# Altium PCB MyECGPCB_V1.2.9.PcbDoc (part 1 of 2)
Units mil, origin at the board's own origin, x right, y up, seen from the top; angles counter-clockwise.
Board outline 3250 x 3250 mil, 2 copper layers (Top Layer, Bottom Layer); 151 components, 107 nets, 475 pads, 167 vias.
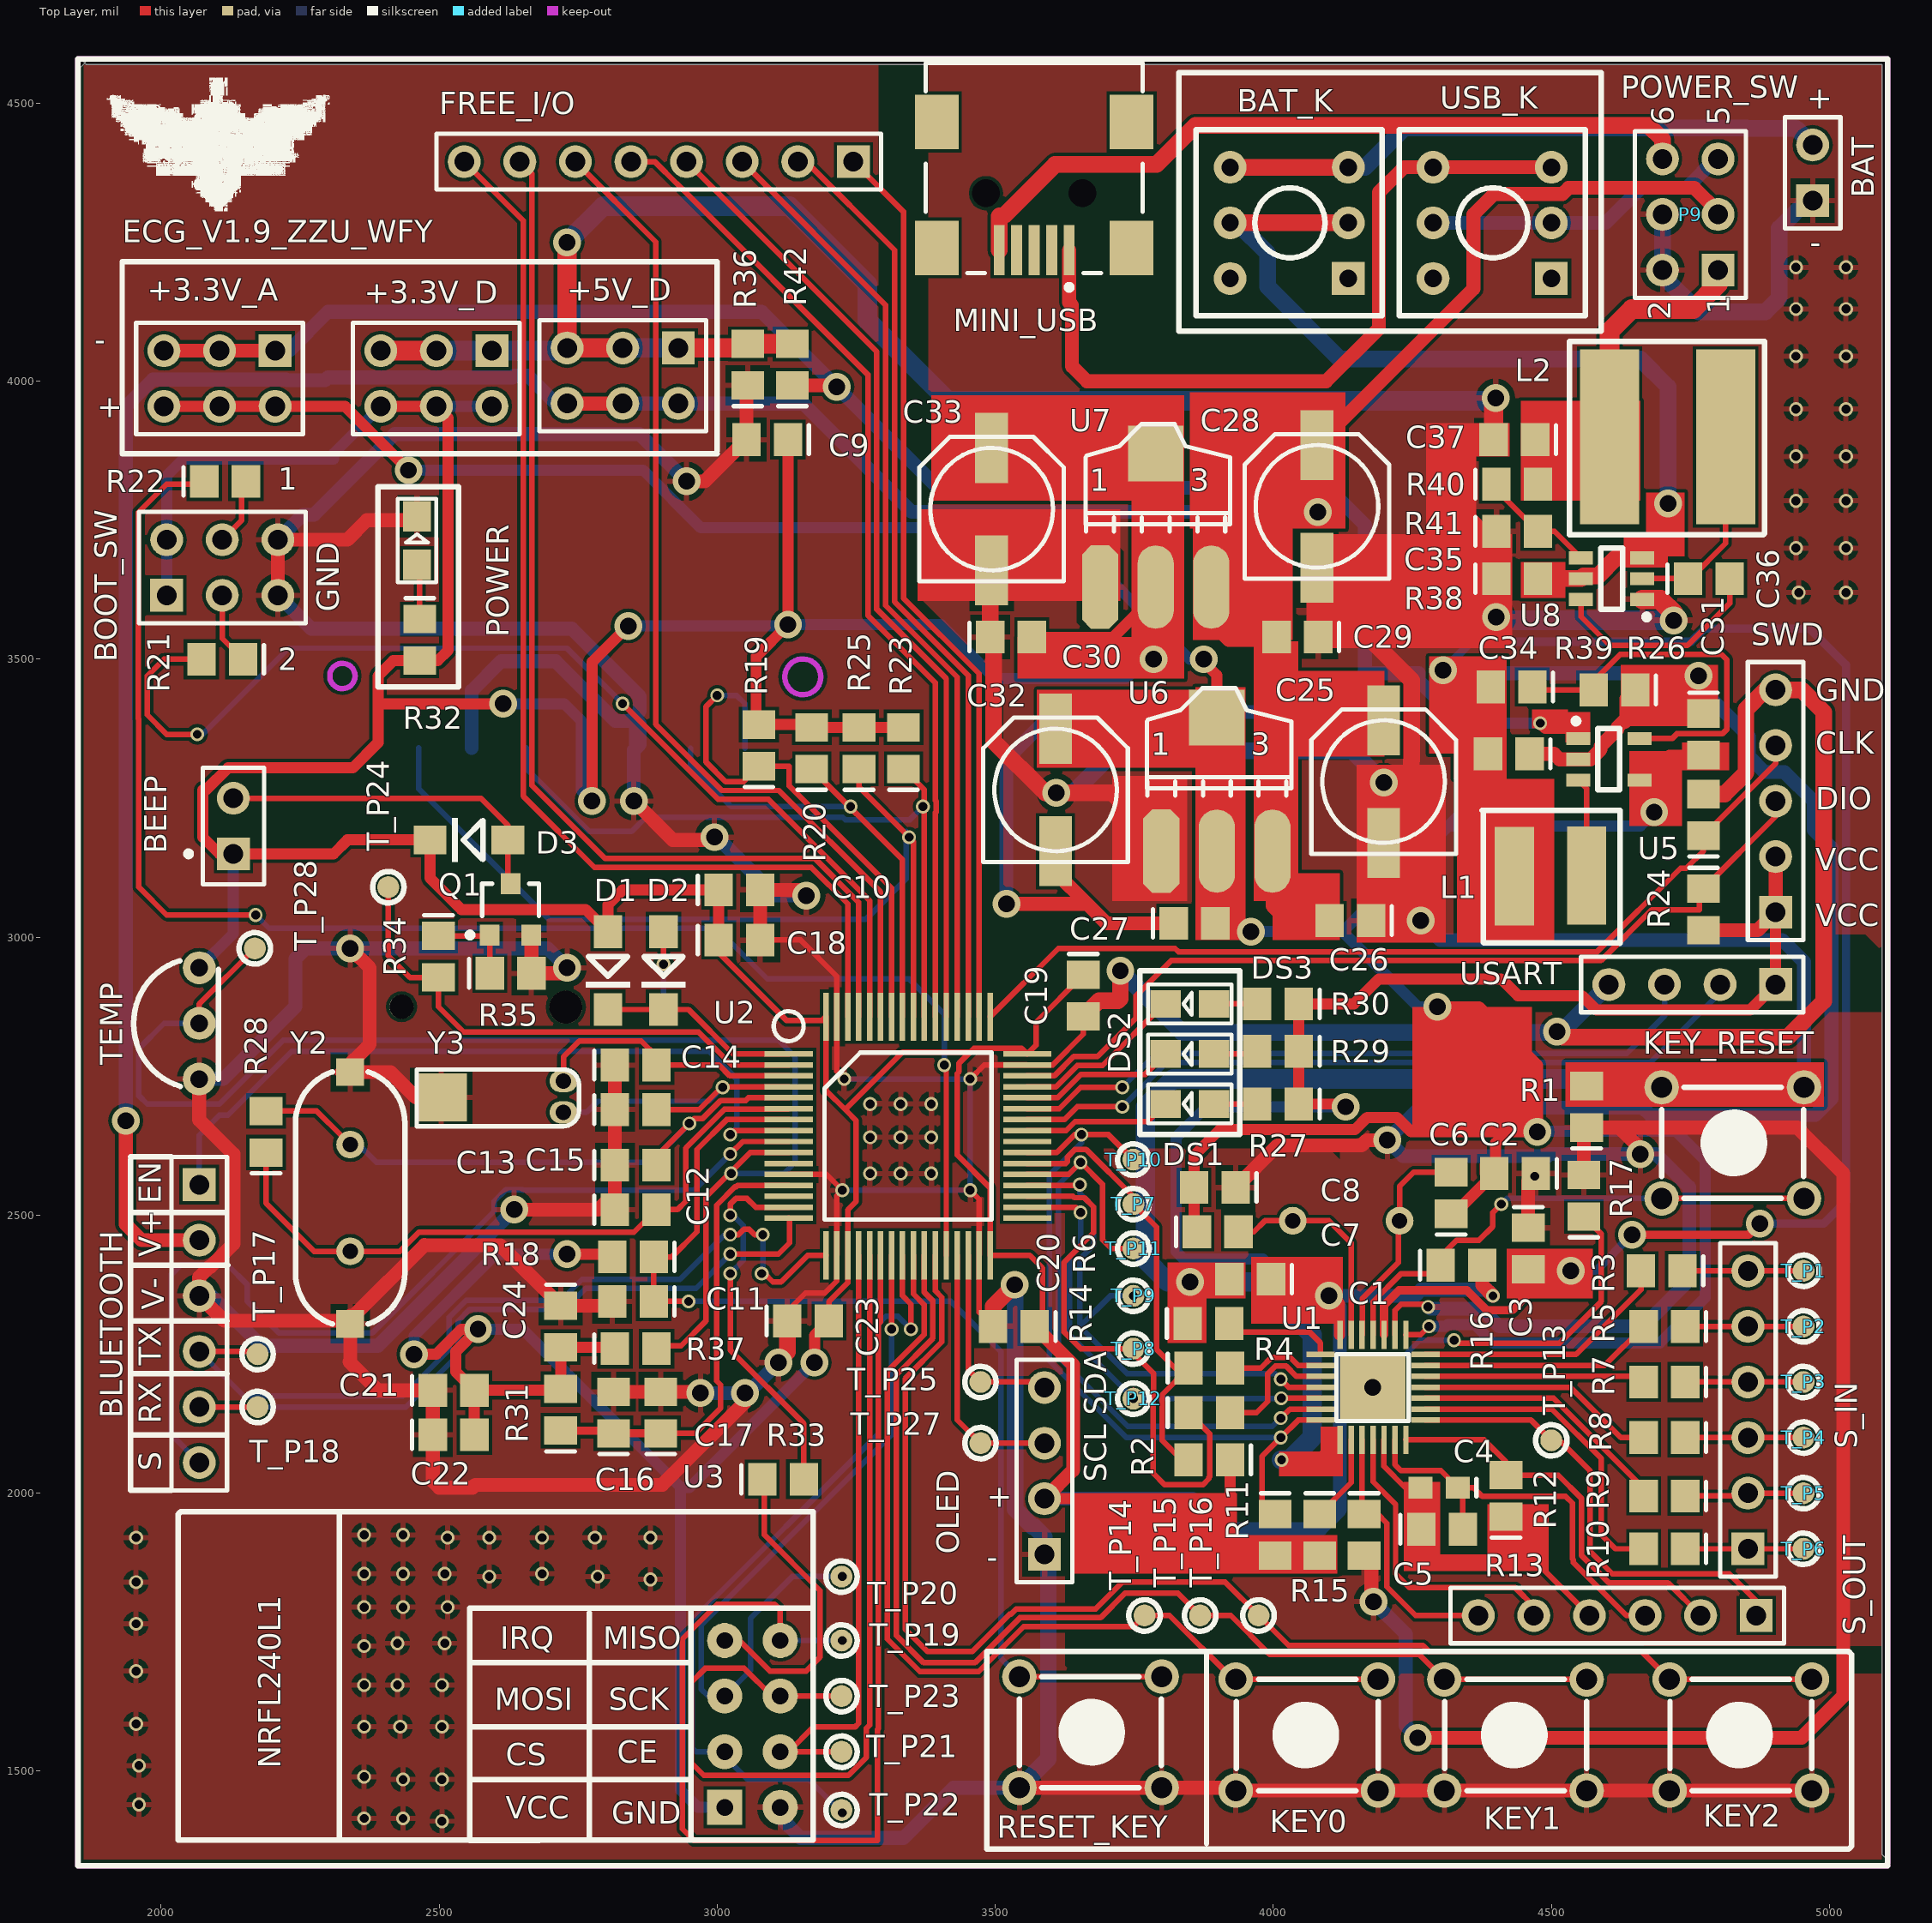
[diagram p0: Top Layer view]
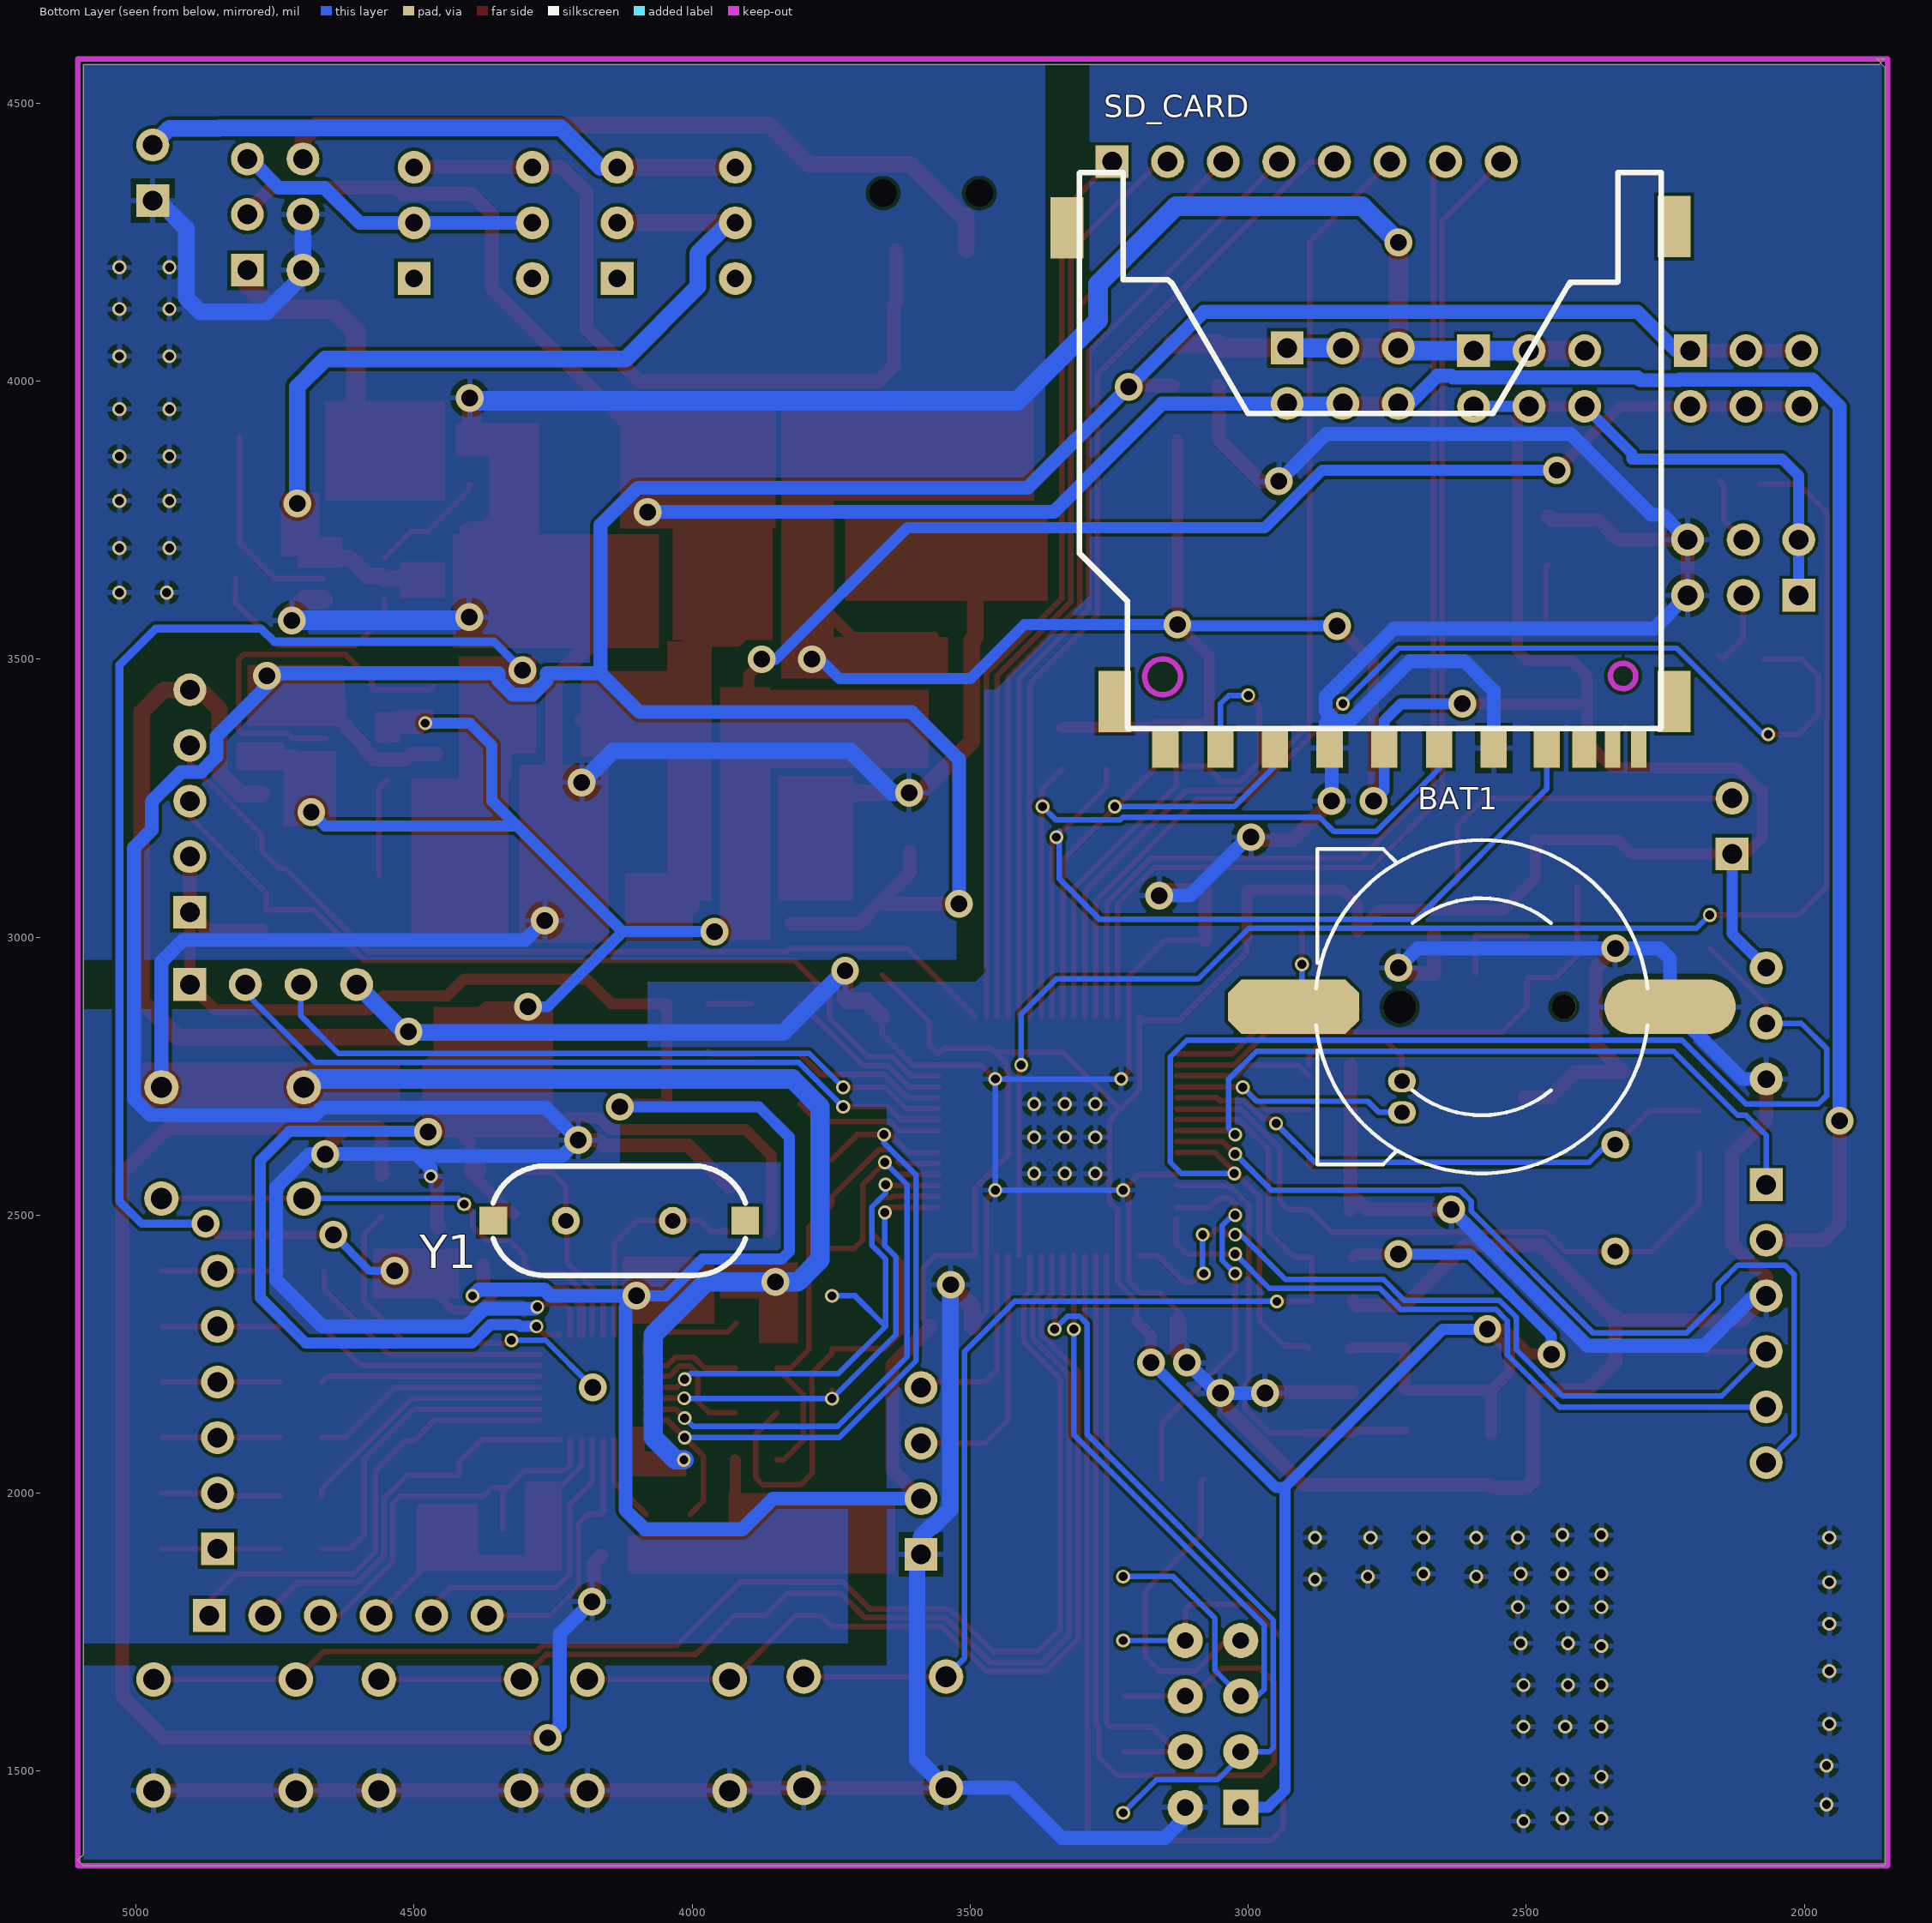
[diagram p1: Bottom Layer view, seen from below]

## Layer stack, top to bottom
Top Solder: solder mask 0.4, Solder Resist, Dk 3.5
Top Layer: signal copper 1.4
Dielectric 1: dielectric 12.6, FR-4, Dk 4.8
Bottom Layer: signal copper 1.4
Bottom Solder: solder mask 0.4, Solder Resist, Dk 3.5

## Board outline
1855,4580 1865,4570 5095,4570 5095,1350 5105,1340 5095,1330 1855,1330 1855,4565 1870,4580

## Design rules (kind name [scope] priority, off if disabled: settings)
Clearance [All] p1: gap=6
PolygonConnect [All] p1: connectstyle=Relief reliefconductorwidth=10 reliefentries=4 polygonreliefangle="90 Angle" airgapwidth=10
RoutingVias [All] p1: holewidth=28 width=50 viastyle="Through Hole" minholewidth=16 minwidth=25 maxholewidth=28 maxwidth=50
SolderMaskExpansion [All] p1: expansion=4
Width [All] p1: maxlimit=40 minlimit=10 preferedwidth=10 minimp=50.000000 maximp=50.000000 favimp=50.000000
30 further rules are at their usual default settings.

## Classes and differential pairs
component class U_PowerSheet: +3.3V_A +3.3V_D +5V_D BAT BAT_K C25 C26 C27 C28 C29 C30 C31 C32 C33 C34 C35 C36 C37 L1 L2 MINI_USB P9 R38 R39 R40 R41 R42 U5 U6 U7 U8 USB_K
component class U_MCUSheet: BAT1 BEEP BLUETOOTH BOOT_SW C9 C10 C11 C12 C13 C14 C15 C16 C17 C18 C19 C20 C21 C22 C23 C24 D1 D2 D3 DS1 DS2 DS3 FREE_I/O KEY0 KEY1 KEY2 OLED POWER Q1 R18 R19 R20 R21 R22 R23 R24 R25 R26 R27 R28 R29 R30 R31 R32 R33 R34 R35 R36 R37 RESET_KEY SD_CARD SWD T_P14 T_P15 T_P16 T_P17 T_P18 T_P19 T_P20 T_P21 T_P22 T_P23 T_P24 T_P25 T_P27 T_P28 TEMP U2 U3 USART Y2 Y3
component class U_FrontEndSheet: C1 C2 C3 C4 C5 C6 C7 C8 KEY_RESET R1 R2 R3 R4 R5 R6 R7 R8 R9 R10 R11 R12 R13 R14 R15 R16 R17 S_IN S_OUT T_P1 T_P2 T_P3 T_P4 T_P5 T_P6 T_P7 T_P8 T_P9 T_P10 T_P11 T_P12 T_P13 U1

## Components (designator, comment, footprint, x,y, rotation, side; value= is the part's Value field where it differs from the comment)
+3.3V_A "+3.3V_A" HDR2X3 2205,4055 r180 top (schematic designator VOUT4)
+3.3V_D "+3.3V_D" HDR2X3 2595,4055 r180 top (schematic designator VOUT3)
+5V_D "+5V_D" HDR2X3 2930,4060 r180 top (schematic designator VOUT2)
BAT "Header 2" HDR1X2 4970,4325 r90 top (schematic designator P8)
BAT1 "BATT" BATM 2580,2875 r270 bottom
BAT_K "BUTTON" BTN8.5*8.5 4135,4185 r180 top (schematic designator K2)
BEEP "Speaker" PIN2 2130,3150 r90 top (schematic designator LS1)
BLUETOOTH "Header 6" HDR1X6 2068.5,2555 r270 top (schematic designator P4)
BOOT_SW "VCC5" HDR2X3 2010,3615 r0 top (schematic designator VOUT1)
C1 "0.1uF" 0805 3958.5,2385 r180 top
C2 "0.1uF" 0805 4435,2575 r180 top
C3 "0.1uF" 0805 4458.5,2440 r270 top
C4 "1nF" 0603 4298.5,2010 r180 top
C5 "0.1uF" 0805 4163.5,1925 r270 top
C6 "22pF" 0805 4320,2540 r90 top
C7 "22pF" 0805 3900,2470 r0 top
C8 "0.1uF" 0805 3895,2550 r180 top
C9 "0.1uf" 0805 3090,3895 r180 top
C10 "0.1uF" 0805 3040,3085 r0 top
C11 "0.1uf" 0805 2848.5,2345 r180 top
C12 "22" 0805 2853.5,2510 r0 top
C13 "22" 0805 2853.5,2690 r0 top
C14 "22" 0805 2853.5,2770 r0 top
C15 "22" 0805 2853.5,2590 r0 top
C16 "10u" 0805 2898.5,2145 r90 top
C17 "0.1uf" 0805 2813.5,2145 r90 top
C18 "0.1uF" 0805 3040,2995 r0 top
C19 "104" 0805 3658.5,2895 r270 top
C20 "104" 0805 3533.5,2300 r180 top
C21 "10uF" 0805 2525.9,2185 r0 top
C22 "104" 0805 2525.9,2105 r0 top
C23 "104" 0805 3163.5,2310 r0 top
C24 "104" 0805 2718.5,2300 r270 top
C25 "220uF" CC6.56.5 4198.5,3280 r270 top
C26 "104" 0805 4138.5,3030 r180 top
C27 "104" 0805 3858.5,3025 r0 top
C28 "220uF" CC6.56.5 4078.5,3775 r270 top
C29 "104" 0805 4043.5,3540 r180 top
C30 "104" 0805 3528.5,3540 r0 top
C31 "4.7uf" 0805 4773.5,3365 r270 top
C32 "220uF" CC6.56.5 3608.5,3265 r270 top
C33 "220uF" CC6.56.5 3493.5,3770 r270 top
C34 "10uf" 0805 4423.5,3330 r180 top
C35 "10uf" 0805 4438.5,3645 r0 top
C36 "100nf" 0805 4783.5,3645 r0 top
C37 "22uf" 0805 4433.5,3895 r180 top
D1 "1N4148" DIODE_SOP 2803.5,3010 r270 top
D2 "1N4148" DIODE_SOP 2903.5,3010 r270 top
D3 "1N4148" DIODE_SOP 2623.5,3175 r180 top
DS1 "LED1" SMDLED 3893.5,2700 r180 top
DS2 "LED1" SMDLED 3893.5,2790 r180 top
DS3 "LED1" SMDLED 3893.5,2880 r180 top
FREE_I/O "Header 8" HDR1X8 3245,4395 r180 top (schematic designator P7)
KEY0 "KEY_M" KEY_M 4188.5,1465 r180 top
KEY1 "KEY_M" KEY_M 4563.5,1465 r180 top
KEY2 "KEY_M" KEY_M 4968.5,1465 r180 top
KEY_RESET "KEY_M" KEY_M 4698.5,2730 r0 top (schematic designator KEY?)
L1 "Inductor" SDR0403 4563.5,3110 r270 top
L2 "Inductor" SDR0805 4813.5,3900 r270 top
MINI_USB "USB" USB/SM0.8-6H5 3570,4545 r90 top (schematic designator USB_?)
OLED "Header 4" HDR1X4 3588.5,1890 r90 top (schematic designator P6)
P9 "Header 3X2" HDR2X3 4800,4200 r90 top
POWER "PWR" SMDLED 2460,3670 r90 top (schematic designator DS0)
Q1 "S8050" SOT-23R 2628.5,3045 r0 top
R1 "0" 0805 4563.5,2695 r90 top
R2 "1M" 0805 3885,2060 r180 top
R3 "0" 0805 4698.5,2400 r180 top
R4 "51" 0805 3885,2225 r0 top
R5 "0" 0805 4703.5,2300 r180 top
R6 "51" 0805 3885,2145 r0 top
R7 "0" 0805 4703.5,2200 r180 top
R8 "0" 0805 4703.5,2100 r180 top
R9 "0" 0805 4703.5,1995 r180 top
R10 "0" 0805 4703.5,1900 r180 top
R11 "1M" 0805 4003.5,1925 r270 top
R12 "10K" 0805 4418.5,1995 r90 top
R13 "10M" 0805 4303.5,1935 r0 top
R14 "1M" 0805 3883.5,2305 r0 top
R15 "1M" 0805 4083.5,1925 r270 top
R16 "1M" 0805 4338.5,2410 r0 top
R17 "0" 0805 4558.5,2535 r90 top
R18 "10K" 0805 2848.5,2425 r180 top
R19 "45K" 0805 3075,3345 r90 top
R20 "45K" 0805 3170,3340 r90 top
R21 "10K" 0805 2110,3500 r180 top
R22 "10K" 0805 2115,3820 r0 top
R23 "45K" 0805 3335,3340 r90 top
R24 "10K" 0805 4773.5,3050 r270 top
R25 "45K" 0805 3255,3340 r90 top
R26 "10K" 0805 4773.5,3220 r90 top
R27 "510" 0805 4008.5,2700 r180 top
R28 "1M" 0805 2188.5,2650 r90 top
R29 "510" 0805 4008.5,2795 r180 top
R30 "510" 0805 4008.5,2880 r180 top
R31 "10" 0805 2718.5,2150 r90 top
R32 "510" 0805 2465,3535 r270 top
R33 "4.7k" 0805 3118.5,2025 r0 top
R34 "1k" 0805 2498.5,2965 r270 top
R35 "10k" 0805 2628.5,2935 r0 top
R36 "0" 0805 3055,4030 r90 top
R37 "4.7K" 0805 2853.5,2260 r0 top
R38 "301K" 0805 4428.5,3450 r180 top
R39 "100K" 0805 4613.5,3445 r180 top
R40 "56.2K" 0805 4438.5,3815 r0 top
R41 "10K" 0805 4438.5,3730 r0 top
R42 "0" 0805 3135,4030 r90 top
RESET_KEY "KEY_M" KEY_M 3543.5,1670 r0 top
S_IN "输入" HDR1X6 4853.5,1900 r90 top (schematic designator P1)
S_OUT "Header 6" HDR1X6 4868.5,1780 r180 top (schematic designator P2)
SD_CARD "sd card" SDCARD_L 3050,3340 r0 bottom (schematic designator SD_CARD?)
SWD "Header 5" HDR1X5 4903.5,3045 r90 top (schematic designator P3)
T_P1 "Test_Pad" PCB_Test_Pad 4953.5,2400 r90 top
T_P2 "Test_Pad" PCB_Test_Pad 4953.5,2300 r90 top
T_P3 "Test_Pad" PCB_Test_Pad 4953.5,2200 r90 top
T_P4 "Test_Pad" PCB_Test_Pad 4953.5,2100 r90 top
T_P5 "Test_Pad" PCB_Test_Pad 4953.5,2000 r90 top
T_P6 "Test_Pad" PCB_Test_Pad 4953.5,1900 r90 top
T_P7 "Test_Pad" PCB_Test_Pad 3748.5,2520 r90 top
T_P8 "Test_Pad" PCB_Test_Pad 3748.5,2260 r90 top
T_P9 "Test_Pad" PCB_Test_Pad 3748.5,2355 r90 top
T_P10 "Test_Pad" PCB_Test_Pad 3748.5,2600 r90 top
T_P11 "Test_Pad" PCB_Test_Pad 3748.5,2440 r90 top
T_P12 "Test_Pad" PCB_Test_Pad 3748.5,2170 r90 top
T_P13 "Test_Pad" PCB_Test_Pad 4500,2095 r90 top
T_P14 "Test_Pad" PCB_Test_Pad 3768.5,1780 r90 top
T_P15 "Test_Pad" PCB_Test_Pad 3868.5,1780 r90 top
T_P16 "Test_Pad" PCB_Test_Pad 3973.5,1780 r90 top
T_P17 "Test_Pad" PCB_Test_Pad 2173.5,2250 r270 top
T_P18 "Test_Pad" PCB_Test_Pad 2173.5,2155 r270 top
T_P19 "Test_Pad" PCB_Test_Pad 3223.5,1735 r270 top
T_P20 "Test_Pad" PCB_Test_Pad 3223.5,1850 r270 top
T_P21 "Test_Pad" PCB_Test_Pad 3223.5,1535 r270 top
T_P22 "Test_Pad" PCB_Test_Pad 3223.5,1430 r270 top
T_P23 "Test_Pad" PCB_Test_Pad 3223.5,1635 r270 top
T_P24 "Test_Pad" PCB_Test_Pad 2408.5,3090 r90 top
T_P25 "Test_Pad" PCB_Test_Pad 3473.5,2200 r270 top
T_P27 "Test_Pad" PCB_Test_Pad 3473.5,2090 r90 top
T_P28 "Test_Pad" PCB_Test_Pad 2168.5,2980 r270 top
TEMP "DS18B20" DS18B20 2068.5,2745 r90 top (schematic designator U4)
U1 "ADS1293" SQA28A 4238.5,2285 r270 top
U2 "STM32F103RCT6" LQFP64 3128.5,2790 r0 top
U3 "NRF24L01" NRF24L01 3113.5,1435 r0 top
U5 "TLV62568" LC-SOT-23-5 4603.5,3320 r180 top
U6 "AMS1117-3.3" AMS1117 3798.5,3155 r0 top
U7 "AMS1117-3.3" AMS1117 3688.5,3630 r0 top
U8 "TPS562200DDC" LC-SOT-23-6 4608.5,3645 r0 top
USART "Header 4" HDR1X4 4903.5,2915 r180 top (schematic designator P5)
USB_K "BUTTON" BTN8.5*8.5 4500,4185 r180 top (schematic designator K1)
Y1 "XTAL/4.098" XTAL_US 4035,2490 r0 bottom
Y2 "8MHz" XTAL_US 2340,2435 r90 top
Y3 "32.768kHz" XTAL32 2723.5,2685 r180 top

## Footprints (in the part's own frame and the unit in brackets; to place one, negate y for a bottom-side part, rotate by r counter-clockwise, add the part's x,y. Pads: shape width x height; smd on the part's side, far side on the other; paste and mask are expansions set on the pad)
0603 [mm] "Chip Capacitor; Body 1.6 x 0.8 mm (LxW typ)"
  rect 1.1x1 smd: 1(-0.85,0) 2(0.85,0)
  silkscreen extent -1.7,-0.4 -1.7,0.4
0805 [mm] "Chip Capacitor; Body 2.0 x 1.2 mm (LxW typ)"
  rect 1.3x1.5 smd: 1(-0.95,0) 2(0.95,0)
  silkscreen extent -1.9,-0.65 -1.9,0.65
AMS1117 [mil]
  oct 65x150 smd: 1(0.03,-0.06)
  oval 65x150 smd: 2(100.03,-0.06) 3(200.03,-0.06)
  rect 100x100 smd: 4(100.03,239.94)
  silkscreen extent -26,100 234,293
BATM [mm]
  round 1.1 hole 1.1 unplated: 0(0,3.748)
  round 1.5 hole 1.5 unplated: 0(0.025,-3.752)
  oct 2.5x6 smd: 1(0,-8.602)
  oval 2.5x6 smd: 2(0,8.598)
  silkscreen extent -7.62,-7.58 7.62,7.57
BTN8.5*8.5 [mm]
  rect 1.5x1.5 hole 0.8: 1(0,0)
  round 1.5 hole 0.8: 2(0,-2.54) 3(0,-5.08) 4(5.4,-5.08) 5(5.4,-2.54) 6(5.4,0)
  silkscreen extent -1.55,-6.79 6.95,1.71
CC6.56.5 [mm]
  rect 3.2x1.5 smd: 1(-2.794,0) 2(2.8,0)
  silkscreen extent -3.3,-3.3 3.3,3.3
DIODE_SOP [mm]
  rect 1.5x1.3 smd: 1(0,0) 2(3.556,0)
  silkscreen extent 1.14,-1.02 2.56,1.02
DS18B20 [mm]
  round 1.5 hole 0.8: 1(0,0) 2(2.54,0) 3(5.08,0)
  silkscreen extent -0.33,-0.87 5.41,3
HDR1X2 [mm] "Connector; Header; 2 Position"
  rect 1.5x1.5 hole 0.9: 1(0,0)
  round 1.5 hole 0.9: 2(2.54,0)
  silkscreen extent -1.27,-1.27 3.81,1.27
HDR1X4 [mm] "Connector; Header; 4 Position"
  rect 1.5x1.5 hole 0.9: 1(0,0)
  round 1.5 hole 0.9: 2(2.54,0) 3(5.08,0) 4(7.62,0)
  silkscreen extent -1.27,-1.27 8.89,1.27
HDR1X5 [mm] "Connector; Header; 5 Position"
  rect 1.5x1.5 hole 0.9: 1(0,0)
  round 1.5 hole 0.9: 2(2.54,0) 3(5.08,0) 4(7.62,0) 5(10.16,0)
  silkscreen extent -1.27,-1.27 11.43,1.27
HDR1X6 [mm] "Connector; Header; 6 Position"
  rect 1.5x1.5 hole 0.9: 1(0,0)
  round 1.5 hole 0.9: 2(2.54,0) 3(5.08,0) 4(7.62,0) 5(10.16,0) 6(12.7,0)
  silkscreen extent -1.27,-1.27 13.97,1.27
HDR1X8 [mm] "Connector; Header; 8 Position"
  rect 1.5x1.5 hole 0.9: 1(0,0)
  round 1.5 hole 0.9: 2(2.54,0) 3(5.08,0) 4(7.62,0) 5(10.16,0) 6(12.7,0) 7(15.24,0) 8(17.78,0)
  silkscreen extent -1.27,-1.27 19.05,1.27
HDR2X3 [mm]
  rect 1.5x1.5 hole 0.9: 1(0,0)
  round 1.5 hole 0.9: 2(0,2.54) 3(2.54,0) 4(2.54,2.54) 5(5.08,0) 6(5.08,2.54)
  silkscreen extent -1.27,-1.27 6.35,3.81
KEY_M [mil]
  round 62 hole 38: 1(0,0) 1(255.91,0) 2(0,-200) 2(255.91,-200)
  silkscreen extent 0,-200 255,0
LC-SOT-23-5 [mm]
  rect 1.1x0.6 smd: 1(1.4,-0.95) 2(1.4,0) 3(1.4,0.95) 4(-1.4,0.95) 5(-1.4,-0.95)
  silkscreen extent -0.5,-1.87 1.62,1.4
LC-SOT-23-6 [mm]
  rect 1.1x0.6 smd: 1(1.4,-0.95) 2(1.4,0) 3(1.4,0.95) 4(-1.4,0.95) 5(-1.4,0) 6(-1.4,-0.95)
  silkscreen extent -0.5,-1.87 1.73,1.4
LQFP64 [mm]
  rect 2.2x0.254 smd: 1(0,0) 2(0,-0.5) 3(0,-1) 4(0,-1.5) 5(0,-2) 6(0,-2.5) 7(0,-3) 8(0,-3.5) 9(0,-4) 10(0,-4.5) 11(0,-5) 12(0,-5.5) 13(0,-6) 14(0,-6.5) 15(0,-7) 16(0,-7.5) 33(10.9,-7.5) 34(10.9,-7) 35(10.9,-6.5) 36(10.9,-6) 37(10.9,-5.5) 38(10.9,-5) 39(10.9,-4.5) 40(10.9,-4) 41(10.9,-3.5) 42(10.9,-3) 43(10.9,-2.5) 44(10.9,-2) 45(10.9,-1.5) 46(10.9,-1) 47(10.9,-0.5) 48(10.9,0)
  rect 0.254x2.2 smd: 17(1.7,-9.2) 18(2.2,-9.2) 19(2.7,-9.2) 20(3.2,-9.2) 21(3.7,-9.2) 22(4.2,-9.2) 23(4.7,-9.2) 24(5.2,-9.2) 25(5.7,-9.2) 26(6.2,-9.2) 27(6.7,-9.2) 28(7.2,-9.2) 29(7.7,-9.2) 30(8.2,-9.2) 31(8.7,-9.2) 32(9.2,-9.2) 49(9.2,1.7) 50(8.7,1.7) 51(8.2,1.7) 52(7.7,1.7) 53(7.2,1.7) 54(6.7,1.7) 55(6.2,1.7) 56(5.7,1.7) 57(5.2,1.7) 58(4.7,1.7) 59(4.2,1.7) 60(3.7,1.7) 61(3.2,1.7) 62(2.7,1.7) 63(2.2,1.7) 64(1.7,1.7)
  silkscreen extent -0.68,-7.56 9.26,1.95
NRF24L01 [mm]
  round 1.6 hole 0.762: 1(0,0) 3(0,2.54) 4(-2.54,2.54) 5(0,5.08) 6(-2.54,5.08) 7(0,7.62) 8(-2.54,7.62)
  rect 1.6x1.6 hole 0.762: 2(-2.54,0)
  silkscreen extent -27.5,-1.5 1.5,13.5
PCB_Test_Pad [mm]
  round 1 smd: 1(0,0)
  silkscreen extent -0.72,-0.72 0.72,0.72
PIN2 [mm] "Photosensitive Diode; 2 Leads"
  rect 1.5x1.5 hole 0.9: 1(0,0)
  round 1.5 hole 0.9: 2(2.54,0)
  silkscreen extent -1.4,-1.4 3.94,2.17
SDCARD_L [mm]
  rect 1.2x1.8 smd: 1(0,0) 2(-2.489,0) 3(-4.983,-0.009) 4(-7.483,-0.009) 5(-9.983,-0.009) 6(-12.483,-0.009) 7(-14.908,-0.009) 9(2.517,-0.009)
  rect 1.1x1.8 smd: 8(-16.612,0)
  rect 0.7x1.8 smd: 10(-17.908,-0.009) 12(-19.101,0)
  rect 1.5x2.8 smd: 11(-20.726,-23.834) 11(-20.726,-2.143) 11(4.826,-2.143) 11(7.01,-23.784)
  Keep-Out Layer circle w0.254: c2.642,-3.26 r0.82
  Keep-Out Layer circle w0.254: c-18.39,-3.3 r0.58
  silkscreen extent -20.13,-26.3 6.44,-0.9
SDR0403 [mm]
  rect 4.5x1.8 smd: 1(-0.025,0) 2(0,-3.3)
  silkscreen extent -3,-4.78 3.07,1.52
SDR0805 [mm]
  rect 8x2.7 smd: 1(0,0) 2(0,-5.3)
  silkscreen extent -4.37,-7.14 4.47,1.78
SMDLED [mm]
  rect 1.4x1.27 smd: 1(0.001,-0.002) 2(2.211,-0.002)
  silkscreen extent -0.8,-0.89 3.01,0.89
SOT-23R [mm]
  rect 0.9x0.95 smd: 1(0.95,-1.048) 2(-0.95,-1.048) 3(0,1.302)
  silkscreen extent -1.98,-1.17 1.3,1.3
SQA28A [mm]
  rect 0.25x1.3 smd: 1(0.9,0.9) 2(1.4,0.9) 3(1.9,0.9) 4(2.4,0.9) 5(2.9,0.9) 6(3.4,0.9) 7(3.9,0.9) 15(3.9,-3.9) 16(3.4,-3.9) 17(2.9,-3.9) 18(2.4,-3.9) 19(1.9,-3.9) 20(1.4,-3.9) 21(0.9,-3.9)
  rect 1.3x0.25 smd: 8(4.8,0) 9(4.8,-0.5) 10(4.8,-1) 11(4.8,-1.5) 12(4.8,-2) 13(4.8,-2.5) 14(4.8,-3) 22(0,-3) 23(0,-2.5) 24(0,-2) 25(0,-1.5) 26(0,-1) 27(0,-0.5) 28(0,0)
  rect 3.002x3.002 smd: 29(2.413,-1.524)
  silkscreen extent 0.89,-3.17 3.94,0.13
USB/SM0.8-6H5 [mm]
  rect 2.3x0.5 smd: 1(-7.85,-1.6) 2(-7.85,-0.8) 3(-7.85,0) 4(-7.85,0.8) 5(-7.85,1.6)
  rect 2.5x2 smd: 6(-7.75,4.45) 7(-1.996,4.45) 8(-7.75,-4.45) 9(-1.996,-4.45)
  round 0.6 hole 1.27 unplated: MH1(-5.25,2.2) MH2(-5.25,-2.2)
  silkscreen extent -9.67,-4.95 0.7,4.95
XTAL32 [mil]
  oval 50x40 hole 28: 1(0,0) 2(0,-56)
  rect 92.13x86 smd: ""(220,-27)
  silkscreen extent -28,-77 264,25
XTAL_US [mil]
  round 50 hole 28: 1(0,0) 2(192.13,0)
  rect 50x50 smd: ""(-130.32,0) ""(322.44,0)
  silkscreen extent -131,-98 323,98

## Part data
+3.3V_A +3.3V_D +5V_D BOOT_SW: library part "Header 3X2", "Header, 3-Pin, Dual row"
BAT: "Header, 2-Pin"
BAT1: library part BAT
BEEP: "Loudspeaker"
BLUETOOTH S_OUT: "Header, 6-Pin"
C1 C2 C3 C4 C5 C6 C7 C8 C9 C10 C11 C12 C13 C14 C15 C16 C17 C18 C19 C20 C21 C22 C23 C24 C26 C27 C29 C30 C35 C36 C37: library part C
C25 C28 C32 C33: library part CAP
C31: library part C, "Cap= 4.7 uF  ESR= 2.0 mOhm  VDC= 25.0 V  IRMS= 7.29 A"
C34: library part C, "Cap= 10.0 uF  ESR= 2.0 mOhm  VDC= 6.3 V  IRMS= 0.0 A"
D1 D2 D3: library part D
DS1 DS2 DS3 POWER: library part LED2, "Typical RED, GREEN, YELLOW, AMBER GaAs LED"
FREE_I/O: "Header, 8-Pin"
L1 L2: "L= 2.2 μH  DCR= 47.0 mOhm"
MINI_USB: library part USB5
OLED USART: "Header, 4-Pin"
P9: "Header, 3-Pin, Dual row"
Q1: library part NPN, "8050/BCW846/BCW847"
R1 R2 R3 R4 R5 R6 R7 R8 R9 R10 R11 R12 R13 R14 R15 R16 R17 R18 R19 R20 R21 R22 R23 R24 R25 R26 R27 R28 R29 R30 R31 R32 R33 R34 R35 R36 R37 R42: library part R
R38 R40 R41: library part R, "Res= 100.0 kOhm  Power= 125.0 mW  Tolerance= 1.0%"
R39: library part R, "Res= 301.0 kOhm  Power= 125.0 mW  Tolerance= 1.0%"
S_IN: library part "Header 6", "Header, 6-Pin"
SWD: "Header, 5-Pin"
U2: library part STM32F103RDT6
U6 U7: library part AMS1117
Y1 Y2 Y3: library part XTAL, "Crystal Oscillator"

## Via types
v1: diameter 25, hole 16, Top Layer to Bottom Layer, 114 vias
v2: diameter 50, hole 30, Top Layer to Bottom Layer, 53 vias

## Nets (pads, with @x,y where several pads share a name; then routed paths per layer and width w, separated by ;. In a path a pad name is that pad's centre, name@x,y a point inside that pad or via, vN(x,y) a via of type N, cw(c..) or ccw(c..) an arc to the next point about the centre after c; other vN are vias at no path point)
18B20_CTR: R37.2 T_P28.1 TEMP.2 U2.10 | length 2462.5
  Top Layer w10: TEMP.2@2068.5,2845 2068.5,2880 T_P28.1@2168.5,2980 ; R37.2@2890.9,2260 2895.9,2265 2935,2265 2979.5,2309.5 2979.5,2532.77 3059.57,2612.83 U2.10@3128.5,2612.83
  Bottom Layer w10: TEMP.2@2068.5,2845 2005,2845 1960,2800 1960,2715 1975,2700 2105,2700 2219.79,2814.79 3110.21,2814.79 3140,2785 3140,2595 3120,2575 v1(3025,2575)
+2.4V_A: C3.2 C34.2 L1.2 R38.2 U1.26 | length 3320.8
  Top Layer w15: U1.26@4199.13,2285 4199.13,2337.97 4226.16,2365 4348.23,2365 4384.23,2329 4429.41,2329 4458.5,2358.09 C3.2@4458.5,2402.6 4532.4,2402.6 v2(4535,2400) ; v2(4305,3480) 4305,3390 4360,3335 C34.2@4391.1,3335 ; R38.2@4391.1,3450 C34.2@4391.1,3335 ; L1.2@4433.58,3110 4433.58,3216.42 4386.1,3263.9 C34.2@4386.1,3330 C34.2@4391.1,3335 ; v2(4645,2465) 4855,2465 v2@4870,2480
  Bottom Layer w15: v2(4305,3480) 4356.5,3531.5 4751.5,3531.5 4775,3555 4965,3555 5029.91,3490.09 5029.91,2524.91 4990,2485 v2(4875,2485) ; v2(4535,2400) 4580,2400 v2(4645,2465)
+3.3V_A: +3.3V_A.2 +3.3V_A.4 +3.3V_A.6 C2.2 C6.1 C7.1 C8.2 C27.2 C31.2 C32.1 U1.28 U5.1 U5.4 U6.2 U6.4 | length 7041.3
  Top Layer w10: U1.28@4238.5,2285 4265,2285 v1(4280,2300)
  Top Layer w20: +3.3V_A.6@2005,3955 +3.3V_A.4@2105,3955 +3.3V_A.2@2205,3955 2330.61,3955 2445,3840.61 v2(2445,3840) ; C32.1@3608.5,3375 3755,3375 3775,3395 3898.47,3395 U6.4@3898.53,3394.94 ; C7.1@3862.6,2470 3857.6,2475 C8.2@3857.6,2550 3857.6,2607.6 3904,2654 4146.98,2654 4168.98,2676 4221.98,2676 4247.98,2650 v2(4475,2650) 4475,2770 4370,2875 v2(4295,2875) ; v2(3875,3500) 3875,3495 3898.53,3471.47 U6.4@3898.53,3394.94 ; v2(3960,3010) 3945,3025 C27.2@3895.9,3025 3898.53,3027.63 U6.2@3898.53,3154.94 U6.4@3898.53,3394.94 ; C6.1@4320,2502.6 4325.2,2502.6 C2.2@4397.6,2575 4400,2577.4 4400,2630 4416,2646 ; C2.2@4381.1,2575 C2.2@4381.1,2591.1 ; v1(4480,3385) 4489.47,3375.53 4530.26,3375.53 U5.1@4548.38,3357.4 ; v2(4685,3225) 4685,3256.22 U5.4@4658.62,3282.6 4667.6,3282.6 4712.6,3327.6 C31.2@4773.5,3327.6
  Bottom Layer w20: v2(2445,3840) 2867.02,3840 2970.52,3736.5 3613.5,3736.5 3850,3500 v2(3875,3500) ; v2(3960,3010) 4125,3010 ; v1(4280,2300) 4309.69,2300 4313.19,2303.5 4362.35,2303.5 4395.85,2270 4695,2270 4776.5,2351.5 4776.5,2598.5 4724,2651 4476,2651 v2(4475,2650) ; v2(4295,2875) 4260,2875 4125,3010 ; 4315,3200 4660,3200 v2(4685,3225) ; v1(4480,3385) 4400,3385 4360,3345 4360,3245 4125,3010
+3.3V_D: +3.3V_D.2 +3.3V_D.4 +3.3V_D.6 BEEP.1 BOOT_SW.1 BOOT_SW.2 C1.1 C9.1 C10.1 C18.1 C19.1 C20.1 C21.2 C22.2 C23.2 C24.2 C30.2 C33.1 D1.1 D3.2 OLED.2 R2.1 R11.2 R15.2 R16.2 R18.2 R19.2 R20.2 R23.2 R24.2 R25.2 R27.1 R29.1 R30.1 R31.2 R32.2 R37.1 SD_CARD.4 SWD.1 SWD.2 TEMP.3 U1.22 U2.19 U2.32 U2.48 U2.64 U3.2 U7.2 U7.4 USART.1 | length 16747.9
  Top Layer w10: C18.1@3002.6,2995 3002.6,2972.4 3125,2850 3188.5,2850 U2.64@3195.43,2856.93 3195.43,2724.57 3232.5,2687.5 ; C23.2@3200.9,2310 3200.9,2344.77 3234.8,2378.67 U2.19@3234.8,2427.79 3234.8,2509.8 3250,2525 3250,2670 3232.5,2687.5 ; 3455,2793.5 3333.5,2793.5 3232.5,2692.5 3232.5,2687.5 ; C20.1@3570.9,2300 3585,2314.1 3585,2405 3562.2,2427.8 U2.32@3490.7,2427.8 3490.7,2549.3 3431.5,2608.5 3431.5,2754.73 3435,2758.23 3435,2773.5 3461.5,2800 3547.63,2800 U2.48@3557.63,2790 3573.5,2805.87 3573.5,2847.4 C19.1@3658.5,2932.4
  Top Layer w20: +3.3V_D.6@2395,3955 +3.3V_D.4@2495,3955 2516,3934 2516,3516 2497.6,3497.6 R32.2@2465,3497.6 2417.6,3497.6 2390,3470 2390,3425 ; v2(2455,2250) 2495,2250 2540,2295 v2(2570,2295) 2530.09,2255.09 2530.09,2218.21 C21.2@2563.3,2185 ; C22.2@2563.3,2105 C21.2@2563.3,2185 ; v2(2615,3420) 2395,3420 2390,3425 ; v2(2730,2430) 2806.1,2430 R18.2@2811.1,2425 ; v2(2775,3245) 2775,3495 v2(2840,3560) ; R37.1@2816.1,2260 2813.5,2262.6 C24.2@2718.5,2262.6 R31.2@2718.5,2187.4 2716.1,2185 C21.2@2563.3,2185 ; C18.1@3002.6,2995 C10.1@3002.6,3085 2830,3085 2803.5,3058.5 D1.1@2803.5,3010 2763.5,3050 2540,3050 2483.5,3106.5 D3.2@2483.5,3175 2335,3175 2310,3150 BEEP.1@2130,3150 2105,3150 2075,3180 2075,3265 2080.61,3265 2120.61,3305 2345,3305 2390,3350 2390,3425 ; C9.1@3127.4,3895 v2(3127.4,3562.4) 3070,3505 3070,3387.4 R19.2@3075,3382.4 3165,3382.4 R20.2@3170,3377.4 R25.2@3255,3377.4 R23.2@3335,3377.4 ; v2(3175,2235) 3175,2284.1 C23.2@3200.9,2310 ; C33.1@3493.5,3880 3778.47,3880 U7.4@3788.53,3869.94 U7.2@3788.53,3629.94 3785,3626.4 U7.2@3785,3612.53 ; C30.2@3565.9,3540 3565.9,3538.94 3711.41,3538.94 U7.2@3785,3612.53 ; OLED.2@3588.5,1990 3645,1990 3740,1895 3940,1895 ; v2(3785,3500) U7.2@3785,3612.53 ; R2.1@3922.4,2060 3922.4,1912.6 3940,1895 ; C1.1@3995.9,2385 4075,2385 4119.07,2340.93 U1.22@4119.07,2285 ; R15.2@4083.5,1887.6 R11.2@4003.5,1887.6 4001.1,1890 3945,1890 3940,1895 ; v2(4130,2695) 4125,2700 R27.1@4045.9,2700 R29.1@4045.9,2795 R30.1@4045.9,2880 4145,2880 4190,2925 4410,2925 4440,2895 4555,2895 4580.53,2869.47 4857.97,2869.47 USART.1@4903.5,2915 SWD.1@4903.5,3045
  Top Layer w25: C20.1@3570.9,2300 3640,2230.9 3640,2041.5 OLED.2@3588.5,1990 ; R16.2@4375.9,2410 4375.9,2374.1 v1(4395,2355) ; R24.2@4773.5,3012.6 4871.1,3012.6 SWD.1@4903.5,3045 SWD.2@4903.5,3145
  Bottom Layer w20: BOOT_SW.1@2010,3615 BOOT_SW.2@2010,3715 2010,3830 2040,3860 2295,3860 2310,3860 2310,3870 +3.3V_D.6@2395,3955 ; TEMP.3@2068.5,2945 2130,3006.5 BEEP.1@2130,3150 ; v2(2455,2250) 2455,2283.24 2601.76,2430 v2(2730,2430) ; +3.3V_D.4@2495,3955 +3.3V_D.2@2595,3955 ; v2(2570,2295) 2650,2295 2934,2011 2934,1466 2965,1435 U3.2@3013.5,1435 ; v2(2615,3420) 2725,3420 2755.39,3389.61 SD_CARD.4@2755.39,3340.36 2755.39,3264.61 v2(2775,3245) ; v2(2840,3560) 3125,3560 v2(3127.4,3562.4) 3402.6,3562.4 3500,3465 3735,3465 3770,3500 v2(3785,3500) ; 2934,2010 2950,2010 v2(3175,2235) ; v2(4100,2355) 4047.38,2355 3981.38,2421 3839,2421 3825,2435 3825,2640 3880,2695 v2(4130,2695)
  Bottom Layer w25: OLED.2@3588.5,1990 3855,1990 3910,1935 4085,1935 4120,1970 4120,2335 v2(4100,2355) 4254.66,2355 4265.66,2366 4384,2366 v1(4395,2355)
AGND: +3.3V_A.1 +3.3V_A.3 +3.3V_A.5 C2.1 C3.1 C5.2 C8.1 C27.1 C31.1 C32.2 C34.1 R1.1 R17.2 R39.1 R42.1 U1.27 U5.2 | length 11530.5
  Top Layer w10: U1.27@4218.81,2285 4218.81,2328.82 4230,2340 4273.5,2340 v1(4278.5,2335)
  Top Layer w25: +3.3V_A.5@2005,4055 +3.3V_A.3@2105,4055 +3.3V_A.1@2205,4055 ; R42.1@3135,3992.6 3212.4,3992.6 v2(3215,3990) ; v2(3520,3060) 3665,3060 ; C32.2@3608.5,3154.76 3608.5,3116.5 3665,3060 ; C27.1@3821.1,3025 3700,3025 3665,3060 ; C8.1@3932.4,2550 4007.9,2625.5 4158.79,2625.5 4168.29,2635 v2(4205,2635) ; C5.2@4163.5,1887.6 4176.5,1874.6 4176.5,1808.5 v2(4180,1805) ; v2(4260,1560) 4950,1560 5025,1635 5025,2575 4942.4,2657.6 4622.4,2657.6 ; C3.1@4455.9,2480 C3.1@4458.5,2477.4 4458.5,2561.1 C2.1@4472.4,2575 ; C34.1@4460,3329.1 C34.1@4460.9,3330 4505,3330 4515,3320 U5.2@4548.38,3320 4570.61,3320 4588.54,3337.93 4588.54,3343.54 4618.46,3373.46 4618.46,3376.88 4629.3,3387.71 4632.71,3387.71 4635,3390 4635,3429.1 R39.1@4650.9,3445 4685,3445 4725,3405 4770.9,3405 C31.1@4773.5,3402.4 4773.5,3461.5 v2(4765,3470) ; R17.2@4555.9,2575 R17.2@4558.5,2572.4 4558.5,2652.6 R1.1@4563.5,2657.6 4622.4,2657.6 ; v2(4660,2610) 4660,2620 4622.4,2657.6
  Bottom Layer w25: +3.3V_A.1@2205,4055 2230,4055 2300,4125 3080,4125 v2(3215,3990) 3396.5,3808.5 4098.02,3808.5 4165,3741.52 4165,3475 ; v2(3520,3060) 3520,3320 3605,3405 4095,3405 4165,3475 ; v2(4180,1805) 4238,1747 4238,1582 v2(4260,1560) ; v1@4283,2332 4374.16,2332 4406.16,2300 4665,2300 4748,2383 4748,2550.5 4688.5,2610 v2(4660,2610) 4496.52,2610 4493.02,2606.5 ; v1(4470,2570) 4470,2583.48 4493.02,2606.5 ; 4165,3475 4261.5,3475 4261.5,3461.98 4286.98,3436.5 4323.02,3436.5 4348.5,3461.98 4348.5,3475 4741.42,3475 4855.47,3360.95 4855.47,3325.11 4883.61,3296.97 4919.45,3296.97 4971.97,3244.45 4971.97,3193.03 5003.91,3161.09 5003.91,2709.5 4974.91,2680.5 4920.5,2680.5 4920,2680 4678.5,2680 4665,2693.5 4263.5,2693.5 v2(4205,2635) 4233.5,2606.5 4493.02,2606.5
BAT+: BAT.2 BAT_K.3 BAT_K.4 | length 1089.5
  Top Layer w30: BAT_K.4@3922.4,4385 BAT_K.3@4135,4385
  Bottom Layer w30: BAT_K.3@4135,4385 4165,4385 4235.53,4455.53 4850.93,4455.53 4851.46,4455 4940,4455 BAT.2@4970,4425
BAT+_K: BAT_K.2 BAT_K.5 C35.2 U8.3 U8.5 | length 1693.9
  Top Layer w30: BAT_K.5@3922.4,4285 BAT_K.2@4135,4285 ; C35.2@4475.9,3645 U8.5@4553.38,3645 4557.97,3649.59 4583.73,3649.59 4616.55,3682.4 U8.3@4663.62,3682.4 4667.4,3682.4 4715,3730 4715,3775 v2(4710,3780)
  Bottom Layer w30: BAT_K.5@3922.4,4285 3935,4285 3990,4230 3990,4170 4120,4040 4660,4040 4710,3990 v2(4710,3780)
BAT-: +3.3V_D.1 +3.3V_D.3 +3.3V_D.5 +5V_D.1 +5V_D.3 +5V_D.5 BAT.1 C1.2 C25.2 C26.1 C28.2 C29.1 C30.1 C33.2 C35.1 C37.2 KEY_RESET.1 P9.2 P9.4 R1.2 R14.1 R36.2 R41.1 R42.2 U1.14 U6.1 U7.1 U8.1 | length 10381.5
  Top Layer w10: v1(4015,2060) 4025,2050 4065,2050 4111.02,2096.02 U1.14@4120.39,2096.02
  Top Layer w25: R1.2@4563.5,2732.4 4565.9,2730 KEY_RESET.1@4698.5,2730 KEY_RESET.1@4954.41,2730
  Top Layer w30: U7.1@3688.53,3629.94 3518.52,3629.94 3491.1,3657.36 C30.1@3491.1,3540 3497.02,3534.08 3497.02,3352.98 3590,3260 v2(3610,3260) 3710,3260 3735,3235 3735,3218.47 U6.1@3798.53,3154.94 ; C28.2@4078.5,3664.76 4080.9,3662.36 C29.1@4080.9,3540 4170.72,3540 4249.03,3461.69 4249.03,3318.31 4248.5,3317.78 4248.5,3278.5 v2(4198.5,3278.5) C25.2@4198.5,3169.76 4195,3166.26 4195,3085 4175.9,3065.9 C26.1@4175.9,3030 v2(4265,3030) ; 4190,3540 4365,3540 v2(4401.1,3576.1)
  Top Layer w35: +3.3V_D.5@2395,4055 +3.3V_D.3@2495,4055 ; v2(2730,4250) +5V_D.5@2730,4060 +5V_D.3@2830,4060 ; +5V_D.1@2930,4060 3047.6,4060 R36.2@3055,4067.4 R42.2@3135,4067.4 ; R14.1@3846.1,2305 3846.1,2361.1 3870,2385 C1.2@3921.1,2385 ; v2@4396.1,3971.1 C37.2@4396.1,3895 4360,3895 4330,3865 4330,3770 4370,3730 R41.1@4401.1,3730 C35.1@4401.1,3645 v2(4401.1,3576.1) ; U8.1@4663.62,3607.6 4697.01,3607.6 4697.01,3605.74 4720,3582.75 v2(4720,3570)
  Bottom Layer w25: v2(4265,3030) 4300,2995 4915,2995 4954.41,2955.59 KEY_RESET.1@4954.41,2730
  Bottom Layer w30: v2(3610,3260) 3640,3260 3715,3335 4142,3335 v2(4198.5,3278.5) ; P9.4@4700,4300 P9.2@4700,4200 4700,4190 4765,4125 4885,4125 4910,4150 4910,4275 BAT.1@4965,4330
  Bottom Layer w35: +3.3V_D.3@2495,4055 +3.3V_D.1@2595,4055 2725,4055 +5V_D.5@2730,4060 ; v2(2730,4250) 2795,4315 3130,4315 3270,4175 3270,4110 3415,3965 4395,3965 v2(4400,3970) ; +5V_D.3@2830,4060 +5V_D.1@2930,4060 ; v1(4015,2060) 4030,2060 4070,2100 4070,2285 3975,2380 v2(3850,2380) 3810,2380 3770,2420 3770,2695 3820,2745 4683.5,2745 KEY_RESET.1@4698.5,2730 ; v2@4422.2,3570 v2(4720,3570)
  other v1: 4945,3620 5030,3620 4940,3700 5030,3700 4940,3785 5030,3785 4940,3865 5030,3865 4940,3950 5030,3950 4940,4045 5030,4045 4940,4130 5030,4130 4940,4205 5030,4205
BAT_IN+: C37.1 L2.2 P9.1 R40.2 | length 668.4
  Top Layer w35: R40.2@4475.9,3815 4470.9,3820 C37.1@4470.9,3895 4599.84,3895 L2.2@4604.84,3900 4604.84,4089.84 4645,4130 4755,4130 4800,4175 P9.1@4800,4205
BOOT0: R21.2 U2.60 | length 1954.9
  Top Layer w10: v1(2065,3365) 2010,3365 1975,3400 1975,3470 2005,3500 R21.2@2072.6,3500 ; v1(2829.75,3420) 3001.75,3248 3092,3248 3274.17,3065.83 U2.60@3274.17,2856.93
  Bottom Layer w10: v1(2065,3365) 2074.44,3365 2229.44,3520 2729.75,3520 v1(2829.75,3420)
BOOT1: R22.1 U2.28 | length 2794.8
  Top Layer w10: R22.1@2080,3815 2010,3815 1959,3764 1959,3393.37 1960,3392.37 1960,3090 2010,3040 v1(2170,3040) ; v1(3408.28,2770) 3411.96,2766.31 U2.28@3411.96,2427.8
  Bottom Layer w10: v1(2170,3040) 2194,3016 2999,3016 3090,2925 3345,2925 3408.28,2861.72 v1(3408.28,2770)
CMOUT: R12.2 S_OUT.2 U1.8 | length 735.1
  Top Layer w10: U1.8@4238.5,2096.02 4378.98,2096.02 4418.5,2056.5 R12.2@4418.5,2032.4 4512.6,2032.4 4554,1991 4554,1888.37 4603.37,1839 4709.5,1839 S_OUT.2@4768.5,1780